# Altium PCB PCB-25x20-mkii.PcbDoc
Units mm, origin at the board's own origin, x right, y up, seen from the top; angles counter-clockwise.
Board outline 63 x 25 mm, 2 copper layers (Top Layer, Bottom Layer); 29 components, 27 nets, 118 pads, 0 vias.
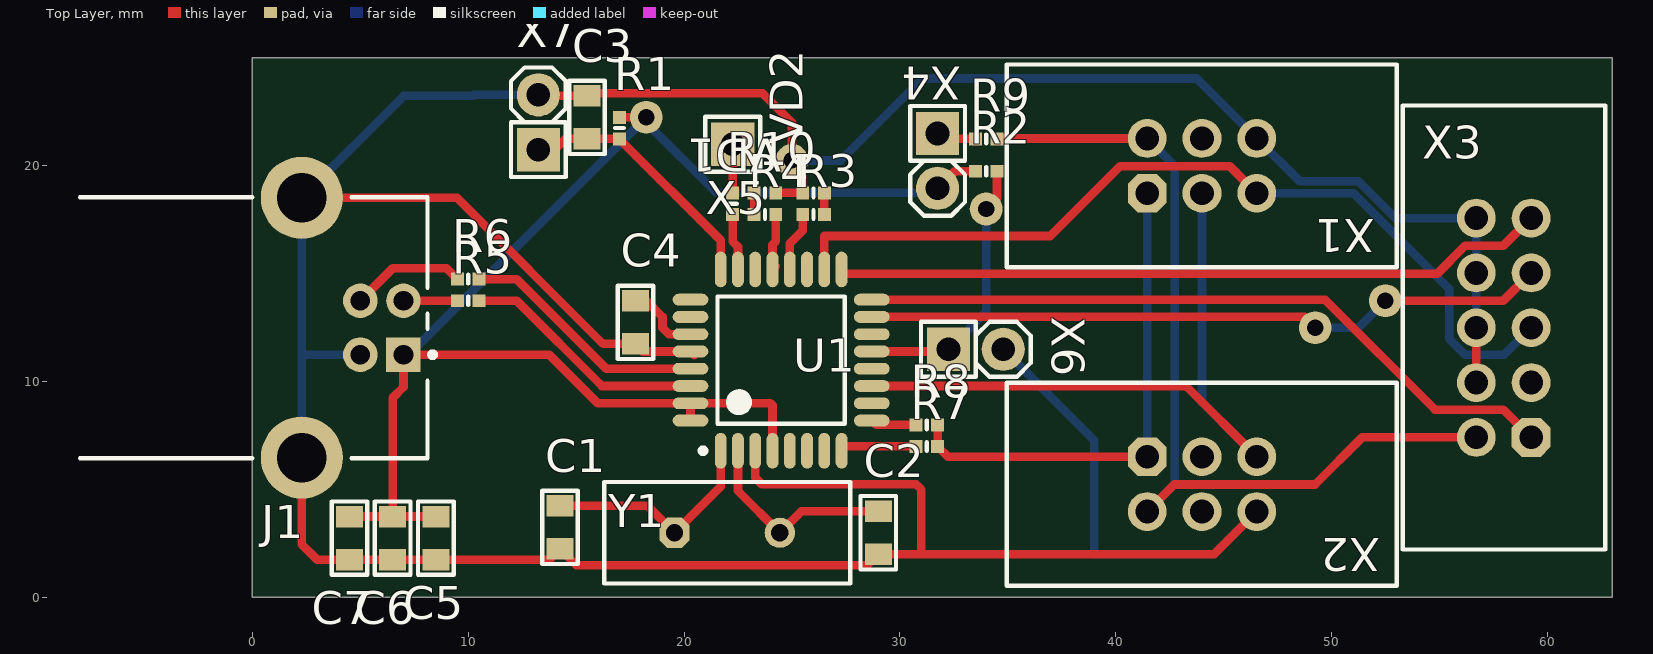
[diagram p0: Top Layer view]
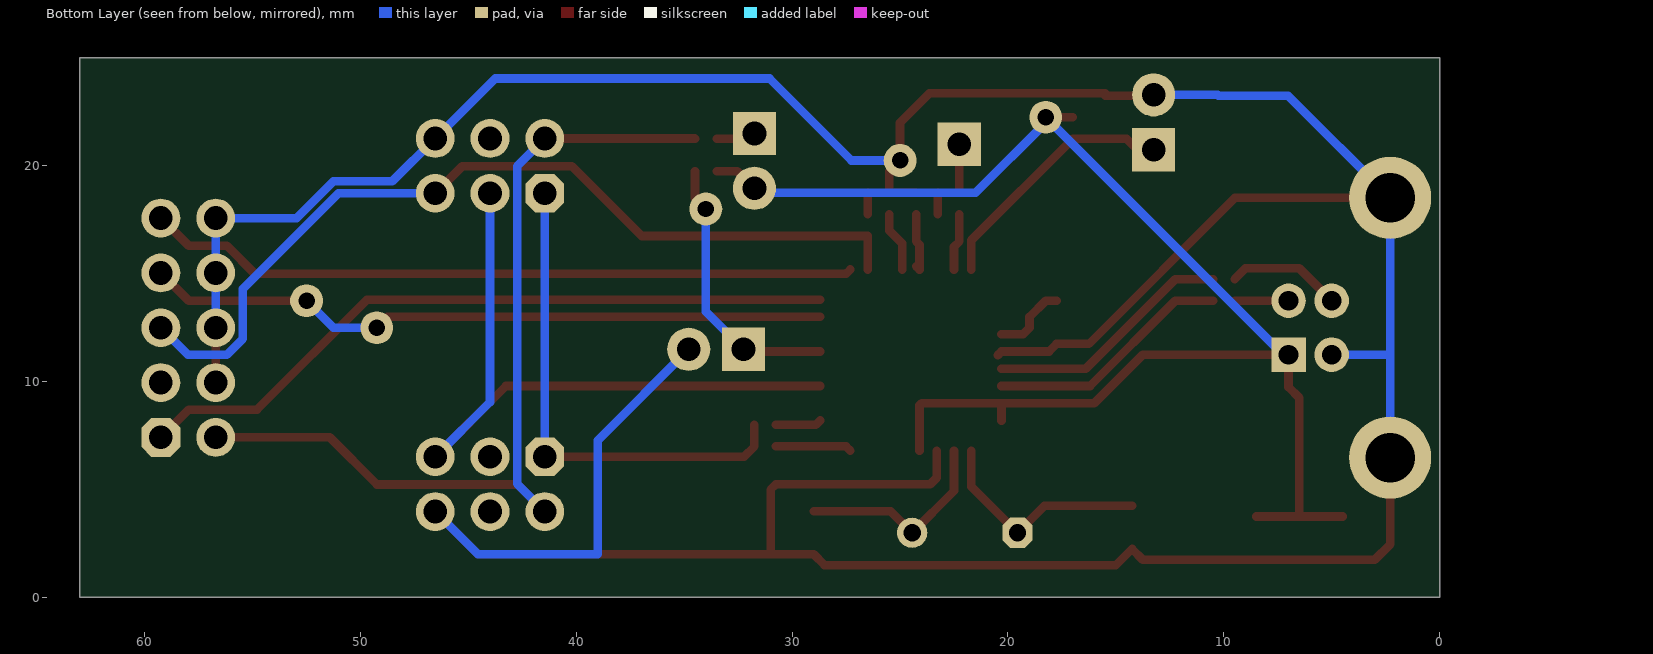
[diagram p1: Bottom Layer view, seen from below]
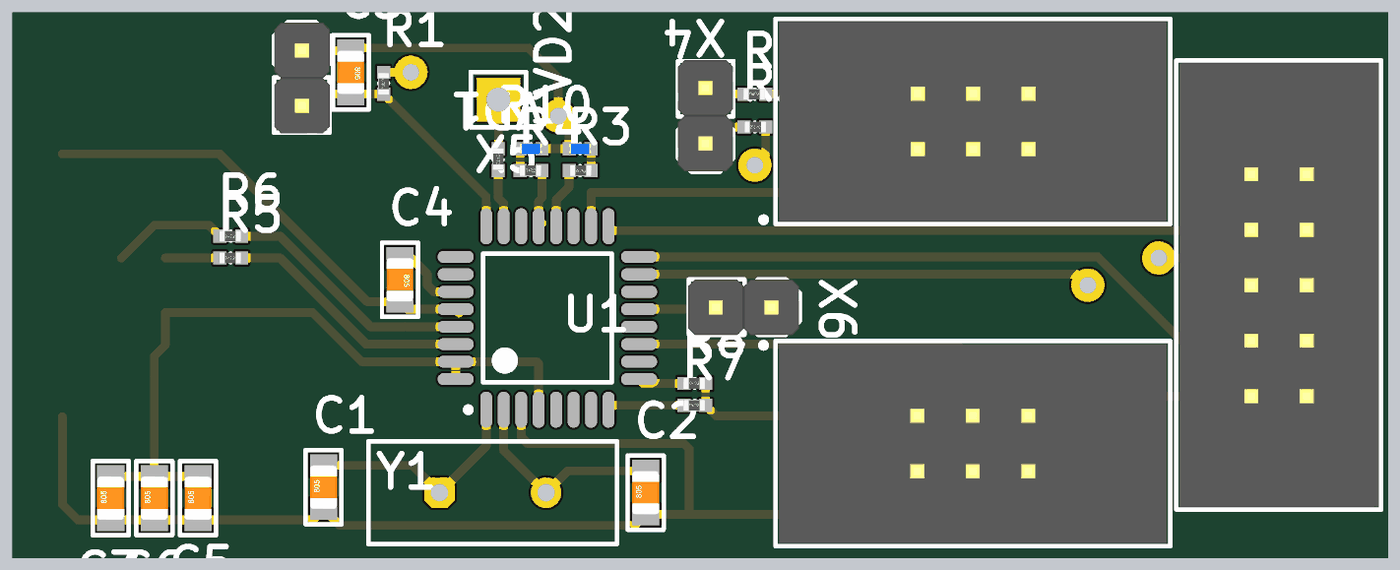
[diagram p2: 3D render of the assembled board from above, using the file's embedded part models]

## Layer stack, top to bottom
Top Solder: solder mask 0.0102, Solder Resist, Dk 3.5
Top Layer: signal copper 0.0356
Dielectric1: dielectric 0.32, FR-4, Dk 4.8
Bottom Layer: signal copper 0.0356
Bottom Solder: solder mask 0.0102, Solder Resist, Dk 3.5

## Board outline
0,0 63,0 63,25 0,25

## Design rules (kind name [scope] priority, off if disabled: settings)
Clearance [All] p1: gap=0.154 ignorepadtopadclearanceinfootprint=FALSE except(0: Arc-Hole Track-Hole SMDPad-Hole THPad-Hole Via-Hole Fill-Hole Poly-Hole Region-Hole Text-Hole)
PolygonConnect [All vs (InPadClass('All Pads'))] p1: connectstyle=Relief reliefconductorwidth=0.254 reliefentries=4 polygonreliefangle="90 Angle" airgapwidth=0.254
PolygonConnect PolygonConnect_Via [All] p2: connectstyle=Direct reliefconductorwidth=0.254 reliefentries=4 polygonreliefangle="90 Angle" airgapwidth=0.254
RoutingVias [All] p1: holewidth=0.711 width=1.27 viastyle="Through Hole" minholewidth=0.711 minwidth=1.27 maxholewidth=0.711 maxwidth=1.27
SilkToSolderMaskClearance SilkscreenOverComponentPads [IsPad] p1: minsilkscreentomaskgap=0.254 clearancetoexposedcopper=TRUE
SolderMaskExpansion [All] p1: expansion=0.102
Width [All] p1: maxlimit=2 minlimit=0.25 preferedwidth=0.4
29 further rules are at their usual default settings.

## Components (designator, comment, footprint, x,y, rotation, side; value= is the part's Value field where it differs from the comment)
C1 "Ceramic capacitor, 22pF, X7R, ±10%, 16V, 0805, -55...+125°C" "CAP: 0805" 14.25,3.25 r90 top value=22pF
C2 "Ceramic capacitor, 22pF, X7R, ±10%, 16V, 0805, -55...+125°C" "CAP: 0805" 29,3 r90 top value=22pF
C3 "Ceramic capacitor, 10μF, X7R, ±10%, 16V, 0805, -55...+125°C" "CAP: 0805" 15.5,22.25 r270 top value=10?F
C4 "Ceramic capacitor, 0.01μF, X7R, ±10%, 16V, 0805, -55...+125°C" "CAP: 0805" 17.75,12.75 r270 top value=0.01?F
C5 "Ceramic capacitor, 10μF, X7R, ±10%, 16V, 0805, -55...+125°C" "CAP: 0805" 8.5,2.75 r270 top value=10?F
C6 "Ceramic capacitor, 0.1μF, X7R, ±10%, 16V, 0805, -55...+125°C" "CAP: 0805" 6.5,2.75 r270 top value=0.1?F
C7 "Ceramic capacitor, 0.1μF, X7R, ±10%, 16V, 0805, -55...+125°C" "CAP: 0805" 4.5,2.75 r270 top value=0.1?F
J1 "1-1470156-1" 1-1470156 -8.01,12.5 r180 top
R1 "Resistor film, 10kR, ±5%, 0402, 0.063W, -55...+125°C" "RES: 0402" 17,21.75 r90 top value=10kR
R2 "Resistor film, 10kR, ±5%, 0402, 0.063W, -55...+125°C" "RES: 0402" 34,19.75 r180 top value=10kR
R3 "Resistor film, 1kR, ±5%, 0402, 0.063W, -55...+125°C" "RES: 0402" 26,17.75 r180 top value=1kR
R4 "Resistor film, 1kR, ±5%, 0402, 0.063W, -55...+125°C" "RES: 0402" 23.75,17.75 r0 top value=1kR
R5 "Resistor film, 27R, ±5%, 0402, 0.063W, -55...+125°C" "RES: 0402" 10,13.75 r0 top value=27R
R6 "Resistor film, 27R, ±5%, 0402, 0.063W, -55...+125°C" "RES: 0402" 10,14.75 r0 top value=27R
R7 "Resistor film, 47R, ±5%, 0402, 0.063W, -55...+125°C" "RES: 0402" 31.25,7 r0 top value=47R
R8 "Resistor film, 47R, ±5%, 0402, 0.063W, -55...+125°C" "RES: 0402" 31.25,8 r0 top value=47R
R9 "Resistor film, 1R, ±5%, 0402, 0.063W, -55...+125°C" "RES: 0402" 34,21.25 r0 top value=1R
R10 "Resistor film, 100R, ±5%, 0402, 0.063W, -55...+125°C" "RES: 0402" 22.25,18.25 r270 top value=100R
U1 "90USB162-16AU" 32MA_N 24.5,11 r90 top
VD1 "LED, *, *, *, -55...+150°C" "LED: 0402B" 23.75,18.75 r0 top
VD2 "LED, *, *, *, -55...+150°C" "LED: 0402B" 26,18.75 r180 top
X1 "Connector, 6pin, 2.54mm, 250VAC, 3A" "CON: IDC-6MS"#1 44,20 r0 top
X2 "Connector, 6pin, 2.54mm, 250VAC, 3A" "CON: IDC-6MS"#2 44,5.25 r0 top
X3 "Connector, 10pin, 2.54mm, 250VAC, 3A" "CON: IDC-10MS" 57.98,12.5 r90 top
X4 "Connector, 2pin, 2.54mm, 500VAC, 3A" "CON: PLS-2" 31.75,20.23 r270 top
X5 "Connector, 2pin, 2.54mm, 500VAC, 3A" "CON: PLS-1" 22.25,21 r0 top
X6 "Connector, 2pin, 2.54mm, 500VAC, 3A" "CON: PLS-2" 33.52,11.5 r0 top
X7 "Connector, 2pin, 2.54mm, 500VAC, 3A" "CON: PLS-2" 13.25,22.02 r90 top
Y1 "16MHz" HC-49U 22,3 r0 top

## Footprints (in the part's own frame and the unit in brackets; to place one, negate y for a bottom-side part, rotate by r counter-clockwise, add the part's x,y. Pads: shape width x height; smd on the part's side, far side on the other; paste and mask are expansions set on the pad)
1-1470156 [mm] "Connector; USB1.1, Type B, Thru-Hole; 4 Position; Right Angle"
  rect 1.6x1.6 hole 0.92: 1(-15.01,1.25)
  round 1.6 hole 0.92: 2(-15.01,-1.25) 3(-13.01,-1.25) 4(-13.01,1.25)
  round 3.8 hole 2.3: 5(-10.3,6.02) 6(-10.3,-6.02)
  silkscreen extent -16.49,-6.05 -0.02,6.05
32MA_N [mm] "Thin QFP, 32-Leads, Body 7x7mm, Pitch 0.8mm, IPC Medium Density"
  oval 1.65x0.55 smd: 1(-4.2,2.8) 2(-4.2,2) 3(-4.2,1.2) 4(-4.2,0.4) 5(-4.2,-0.4) 6(-4.2,-1.2) 7(-4.2,-2) 8(-4.2,-2.8) 17(4.2,-2.8) 18(4.2,-2) 19(4.2,-1.2) 20(4.2,-0.4) 21(4.2,0.4) 22(4.2,1.2) 23(4.2,2) 24(4.2,2.8)
  oval 0.55x1.65 smd: 9(-2.8,-4.2) 10(-2,-4.2) 11(-1.2,-4.2) 12(-0.4,-4.2) 13(0.4,-4.2) 14(1.2,-4.2) 15(2,-4.2) 16(2.8,-4.2) 25(2.8,4.2) 26(2,4.2) 27(1.2,4.2) 28(0.4,4.2) 29(-0.4,4.2) 30(-1.2,4.2) 31(-2,4.2) 32(-2.8,4.2)
  silkscreen extent -4.32,-2.95 2.95,3.75, body extent -3.5,-3.5 3.5,3.5, height 1.2
"CAP: 0805" [mm]
  rect 1x1.25 smd: 1(-1,0) 2(1,0)
  silkscreen extent -1.7,-0.82 1.7,0.82, body extent -1,-0.62 1,0.63, height 0.78
"CON: IDC-6MS"#1 [mm] "IDC-6MS 6 pin PCB-mount connector"
  oct 1.8x1.8 hole 1.1: 1(-2.54,-1.27)
  round 1.8 hole 1.1: 2(-2.54,1.27) 3(0,-1.27) 4(0,1.27) 5(2.54,-1.27) 6(2.54,1.27)
  round 0.5 on Top Overlay: ""(-9.6,-4.5)
  round 0.5 on Mech1: ""(-8.4,-4)
  silkscreen extent -9.05,-4.7 9.03,4.7, body extent -8.89,-4.55 8.87,4.55, height 9
"CON: IDC-6MS"#2 [mm] "IDC-6MS 6 pin PCB-mount connector"
  oct 1.8x1.8 hole 1.1: 1(-2.54,1.27)
  round 1.8 hole 1.1: 2(-2.54,-1.27) 3(0,1.27) 4(0,-1.27) 5(2.54,1.27) 6(2.54,-1.27)
  round 0.5 on Top Overlay: ""(-9.6,4.5)
  round 0.5 on Mech1: ""(-8.4,4)
  silkscreen extent -9.05,-4.7 9.03,4.7, body extent -8.89,-4.55 8.87,4.55, height 9
"CON: IDC-10MS" [mm] "IDC-10MS 10 pin PCB-mount header"
  oct 1.8x1.8 hole 1.1: 1(-5.08,-1.27)
  round 1.8 hole 1.1: 2(-5.08,1.27) 3(-2.54,-1.27) 4(-2.54,1.27) 5(0,-1.27) 6(0,1.27) 7(2.54,-1.27) 8(2.54,1.27) 9(5.08,-1.27) 10(5.08,1.27)
  round 0.5 on Mech1: ""(-9.6,-4)
  round 0.5 on Top Overlay: ""(-9.6,-4)
  silkscreen extent -10.28,-4.7 10.3,4.67, body extent -10.14,-4.57 10.16,4.53, height 9
"CON: PLS-1" [mm]
  rect 2x2 hole 1.1: 1(0.005,0)
  silkscreen extent -1.26,-1.27 1.28,1.27
"CON: PLS-2" [mm]
  rect 2x2 hole 1.1: 1(-1.27,0)
  round 2 hole 1.1: 2(1.27,0)
  silkscreen extent -2.54,-1.27 2.54,1.27, body extent -2.57,-1.28 2.51,1.26, height 8.54
HC-49U [mm] "Quartz Crystal, Thru-Hole; 2 Leads; Body 11.35 x 4.65 x 13.46 mm (LxWxH max)"
  oct 1.4x1.4 hole 0.8: 1(-2.44,0)
  round 1.4 hole 0.8: 2(2.44,0)
  silkscreen extent -5.7,-2.35 5.7,2.35
"LED: 0402B" [mm]
  rect 0.6x0.6 smd: 1(-0.5,0) 2(0.5,0)
  silkscreen extent 0,-0.2 0,0.2, body extent -0.5,-0.25 0.51,0.25, height 0.45
"RES: 0402" [mm]
  rect 0.6x0.6 smd: 1(-0.5,0) 2(0.5,0)
  silkscreen extent 0,-0.2 0,0.2, body extent -0.52,-0.25 0.48,0.25, height 0.34

## Part data
C1 C2: library part Ceramic_0805, Manufacturer=Yageo, Package=0805, PartNumber=CC0805KRX7R7BB104, Temperature=-55...+125°C, Tolerance=±10%, TypeCapacitor="Ceramic capacitor", TypeDielectric=X7R, Voltage=16V, HelpURL=https://www.digikey.com/product-detail/en/yageo/CC0805KRX7R7BB104/311-1142-1-ND/303052, ValueManufacturerPartNumber="Ceramic capacitor, 22pF, X7R, ±10%, 16V, 0805, -55...+125°C"
C3 C5: library part Ceramic_0805, Manufacturer=Yageo, Package=0805, PartNumber=CC0805KRX7R7BB104, Temperature=-55...+125°C, Tolerance=±10%, TypeCapacitor="Ceramic capacitor", TypeDielectric=X7R, ValueManufacturerPartNumber="Ceramic capacitor, 10?F, X7R, ±10%, 16V, 0805, -55...+125°C", Voltage=16V, HelpURL=https://www.digikey.com/product-detail/en/yageo/CC0805KRX7R7BB104/311-1142-1-ND/303052
C4: library part Ceramic_0805, Manufacturer=Yageo, Package=0805, PartNumber=CC0805KRX7R7BB104, Temperature=-55...+125°C, Tolerance=±10%, TypeCapacitor="Ceramic capacitor", TypeDielectric=X7R, ValueManufacturerPartNumber="Ceramic capacitor, 0.01?F, X7R, ±10%, 16V, 0805, -55...+125°C", Voltage=16V, HelpURL=https://www.digikey.com/product-detail/en/yageo/CC0805KRX7R7BB104/311-1142-1-ND/303052
C6 C7: library part Ceramic_0805, Manufacturer=Yageo, Package=0805, PartNumber=CC0805KRX7R7BB104, Temperature=-55...+125°C, Tolerance=±10%, TypeCapacitor="Ceramic capacitor", TypeDielectric=X7R, ValueManufacturerPartNumber="Ceramic capacitor, 0.1?F, X7R, ±10%, 16V, 0805, -55...+125°C", Voltage=16V, HelpURL=https://www.digikey.com/product-detail/en/yageo/CC0805KRX7R7BB104/311-1142-1-ND/303052
J1: "USB 1.1, Right Angle, Thru-Hole, B Type, Receptacle, 4 Position, White", PackageDocument=02-Jun-2001, ComponentLink1Description="Manufacturer Link", ComponentLink1URL=http://www.tycoelectronics.com/, ComponentLink2Description="Packaging Specification", ComponentLink2URL=http://ecommas.tycoelectronics.com/commerce/DocumentDelivery/DDEController?Action=showdoc&DocId=Customer+Drawing%7F1470156%7FO%7Ftif%7FEnglish%7FC_1470156_O.tif, ContactMaterial="Phosphor Bronze", ContactPlating="Gold over Nickel", DatasheetDocument=02-Jun-2001, DrillSize="Corresponds to nominal value.", HousingMaterial="Glass-Filled Thermoplastic", PackageReference=1-1470156, PanelGround=Without, PCB_Layout="Complies with manufacturer's recommendation.", Published=15-Jul-2004, Publisher="Altium Limited", TerminationLength="3.00mm [0.118in.]"
R1 R2 R3 R4 R5 R6 R7 R8 R9 R10: library part Resistor_0402, Manufacturer=Yageo, Package=0402, PartNumber=RC0402JR-07100RL, Power=0.063W, Temperature=-55...+125°C, Tolerance=±5%, TypeResistor="Resistor film", HelpURL=https://www.digikey.com/product-detail/en/yageo/RC0402JR-07100RL/311-100JRCT-ND/729362
  R1 R2: ValueManufacturerPartNumber="Resistor film, 10kR, ±5%, 0402, 0.063W, -55...+125°C"
  R3 R4: ValueManufacturerPartNumber="Resistor film, 1kR, ±5%, 0402, 0.063W, -55...+125°C"
  R5 R6: ValueManufacturerPartNumber="Resistor film, 27R, ±5%, 0402, 0.063W, -55...+125°C"
  R7 R8: ValueManufacturerPartNumber="Resistor film, 47R, ±5%, 0402, 0.063W, -55...+125°C"
  R9: ValueManufacturerPartNumber="Resistor film, 1R, ±5%, 0402, 0.063W, -55...+125°C"
  R10: ValueManufacturerPartNumber="Resistor film, 100R, ±5%, 0402, 0.063W, -55...+125°C"
U1: "8-bit AVR Microcontroller, 2.7-5.5V, 16KB Flash, 512 Bytes EEPROM, 512 Bytes SRAM, USB Controller, 32-pin TQFP, Industrial Grade (-40°C to 85°C)", ComponentLink1Description="Manufacturer URL", ComponentLink1URL=http://www.atmel.com/, ComponentLink2Description="AT90USB82/162 Datasheet", ComponentLink2URL=http://www.atmel.com/dyn/resources/prod_documents/doc7707.pdf, DatasheetVersion="revF, Nov-2010", PackageDescription="32-Lead Thin Profile Plastic Quad Flatpack (TQFP) - 7x7x1mm Body,  0.8 mm Pitch", PackageReference=32MA, PackageVersion="revB, Jul-2007"
VD1 VD2: library part LED_single, Color=GREEN, Temperature=-55...+150°C, TypeDiode=LED, ValueManufacturerPartNumber="LED, *, *, *, -55...+150°C"
X1 X2: library part IDC-6, CurrentMax=3A, Manufacturer=Connfly, VoltageMax=250VAC, HelpURL=https://ru.aliexpress.com/item/1719644716.html?spm=a2g0v.search0104.3.23.4d9c1bc6xlIt6Q&ws_ab_test=searchweb0_0%2Csearchweb201602_10_10065_10068_319_317_10696_453_10084_454_10083_10618_10307_10301_537_536_10059_10884_10887_321_322_10915_10103_10914_10911_10910%2Csearchweb201603_52%2CppcSwitch_0&algo_expid=18a75006-9775-490c-9b34-8e5eba9edd8d-3&algo_pvid=18a75006-9775-490c-9b34-8e5eba9edd8d&transAbTest=ae803_5, Multichannel=6pin, PartNumber=IDC-6, Pitch=2.54mm, TypeConnector=Connector, ValueManufacturerPartNumber="Connector, 6pin, 2.54mm, 250VAC, 3A"
  X1: CommentText="\"PTI\""
  X2: CommentText="\"PDI\""
X3: library part IDC-10, CurrentMax=3A, Manufacturer=Connfly, VoltageMax=250VAC, CommentText="\"ISP\"", HelpURL=https://www.chipdip.ru/product/idc-10ms, Multichannel=10pin, PartNumber=IDC-10, Pitch=2.54mm, TypeConnector=Connector, ValueManufacturerPartNumber="Connector, 10pin, 2.54mm, 250VAC, 3A"
X4 X6 X7: library part PLS-2, CurrentMax=3A, Manufacturer=Connfly, VoltageMax=500VAC, CommentText="\"Ðàçúåì\"", HelpURL=https://www.chipdip.ru/product/pls-2, Multichannel=2pin, PartNumber=PLS-2, Pitch=2.54mm, TypeConnector=Connector, ValueManufacturerPartNumber="Connector, 2pin, 2.54mm, 500VAC, 3A"
X5: library part PLS-1, CurrentMax=3A, Manufacturer=Connfly, VoltageMax=500VAC, ="EXTERNAL CLOCK", CommentText="\"Ðàçúåì\"", HelpURL=https://www.chipdip.ru/product/pls-2, Multichannel=2pin, PartNumber=PLS-1, Pitch=2.54mm, TypeConnector=Connector, ValueManufacturerPartNumber="Connector, 2pin, 2.54mm, 500VAC, 3A"
Y1: library part ECS-10-13-1, "Crystal Oscillator", ComponentLink1Description="Manufacturer Link", ComponentLink1URL=http://www.ecsxtal.com/, ComponentLink2Description=Datasheet, ComponentLink2URL=http://www.ecsxtal.com/pdf2/HC49U.PDF, DatasheetDocument=18-Apr-2000, PackageReference=HC-49U, Published=17-Jul-2002, Publisher="Altium Limited"

## Free pads (board coordinates)
  round 1.524 hole 0.762: 5(25,20.25) 7(18.25,22.25) 8(52.5,13.75) 9(49.25,12.5) 11(34,18)

## Nets (pads, with @x,y where several pads share a name; then routed paths per layer and width w, separated by ;. In a path a pad name is that pad's centre, name@x,y a point inside that pad or via, vN(x,y) a via of type N, cw(c..) or ccw(c..) an arc to the next point about the centre after c; other vN are vias at no path point)
CLK: U1.11 X1.3 X2.5 | length 32.5
  Top Layer w0.4: U1.11 43.26,9.8 X2.5
  Bottom Layer w0.4: X1.3 44,9.06 X2.5
CLK_EXT: R10.2 U1.23 | length 2.7
  Top Layer w0.4: R10.2 22.25,16.5 22.5,16.25 U1.23
D+: J1.3 R6.1 | length 5.3
  Top Layer w0.4: J1.3 6.5,15.25 9,15.25 R6.1
D-: J1.2 R5.1 | length 2.5
  Top Layer w0.4: J1.2 R5.1
DATA: R7.2 R8.2 X1.1 X2.1 | length 23.1
  Top Layer w0.4: R8.2 R7.2 32.23,6.52 X2.1
  Bottom Layer w0.4: X2.1 X1.1
GND: C1.1 C2.1 C3.1 C4.2 C5.2 C6.2 C7.2 J1.4 J1.5 J1.6 pad.5 U1.3 U1.28 VD1.2 VD2.2 X1.6 X2.6 X3.4 X3.6 X3.8 X3.10 X6.2 X7.2 | length 191.5
  Top Layer w0.4: J1.5 2.29,2.46 3,1.75 C7.2 C6.2 C5.2 13.75,1.75 C1.1 15,1.5 28.5,1.5 C2.1 31,2 ; J1.6 9.48,18.52 16.25,11.75 C4.2 18.1,11.4 U1.28 U1.28@20.471,11.229 ; X7.2 13.29,23.25 C3.1 15.5,23.366 23.634,23.366 25,22 pad.5 25.5,19.75 VD2.2 VD1.2 ; U1.3 23.3,5.55 23.6,5.25 30.75,5.25 31,5 31,2 ; X2.6 44.56,2 31,2 ; X3.4 X3.6
  Bottom Layer w0.4: J1.5 2.29,11.25 ; J1.4 2.29,11.25 ; X7.2 10.29,23.29 10.25,23.25 7.02,23.25 J1.6 2.29,11.25 ; pad.5 27.25,20.25 31.047,24.047 43.763,24.047 X1.6 48.526,19.284 51.249,19.284 52.953,17.58 X3.10 X3.8 X3.6 ; X6.2 39,7.29 39,2 44.56,2 X2.6
JP_HWB: pad.11 R2.1 U1.13 X6.1 | length 13
  Top Layer w0.4: U1.13 32.4,11.4 X6.1@32.5,11.5 ; pad.11 34.5,18.5 R2.1
  Bottom Layer w0.4: X6.1 34,13.25 pad.11
JP_RES: C3.2 R1.1 U1.24 X7.1 | length 12
  Top Layer w0.4: X7.1 14,20.75 14.5,21.25 C3.2 R1.1 21.696,16.554 21.696,16.271 21.7,16.267 U1.24
LED1: R3.2 U1.20 | length 2.8
  Top Layer w0.4: U1.20 24.9,16.4 25.5,17 R3.2
LED2: R4.2 U1.21 | length 2.8
  Top Layer w0.4: U1.21@24.25,15.35 U1.21 24.1,16.35 24.25,16.5 R4.2
MISO: U1.17 X3.9 | length 33.1
  Top Layer w0.4: U1.17 27.5,15 54.897,15 56.191,16.294 57.964,16.294 X3.9
MOSI: U1.16 X3.1 | length 33.2
  Top Layer w0.4: U1.16 49.7,13.8 54.794,8.706 57.964,8.706 X3.1
NetC4_1: C4.1 U1.27 | length 3.5
  Top Layer w0.4: C4.1 18.25,13.75 19,13 19,12.5 19.3,12.2 U1.27
NetR3_1: R3.1 VD2.1 | length 1
  Top Layer w0.4: R3.1 VD2.1
NetR4_1: R4.1 VD1.1 | length 1
  Top Layer w0.4: R4.1 VD1.1
NetR5_2: R5.2 U1.30 | length 11.4
  Top Layer w0.4: R5.2 12.25,13.75 16.2,9.8 U1.30
NetR6_2: R6.2 U1.29 | length 11.5
  Top Layer w0.4: R6.2 12.25,14.75 16.4,10.6 U1.29
NetR7_1: R7.1 U1.8 | length 3.5
  Top Layer w0.4: U1.8 27.5,7 R7.1
NetR8_1: R8.1 U1.9 | length 2.1
  Top Layer w0.4: U1.9 28.9,8 R8.1
NetR9_1: R9.1 X4.1 | length 1.9
  Top Layer w0.4: X4.1 32,21.25 R9.1
NetR10_1: R10.1 X5.1 | length 2.3
  Top Layer w0.4: R10.1 22.255,18.755 X5.1
RES: U1.18 X1.5 X3.5 | length 41.1
  Top Layer w0.4: U1.18 26.5,16.75 36.972,16.75 40.206,19.984 45.286,19.984 X1.5
  Bottom Layer w0.4: X1.5 51.02,18.73 55.456,14.294 55.456,11.981 56.191,11.246 57.996,11.246 X3.5
SCK: pad.8 pad.9 U1.15 X3.7 | length 31.8
  Top Layer w0.4: U1.15 48.75,13 pad.9 ; pad.8 56.187,13.75 56.191,13.754 57.964,13.754 X3.7
  Bottom Layer w0.4: pad.9 51.25,12.5 pad.8
VCC: C5.1 C6.1 C7.1 J1.1 pad.7 R1.2 R2.2 U1.4 U1.31 U1.32 X4.2 | length 67.7
  Top Layer w0.4: C7.1 C6.1 ; C5.1 C6.1 ; R1.2 pad.7 ; U1.32 U1.31 ; U1.4 24.1,8.9 24,9 U1.31 ; X4.2 32.54,19.75 R2.2 ; C6.1 6.5,9.25 7,9.75 J1.1 13.75,11.25 16,9 U1.31
  Bottom Layer w0.4: J1.1 7.25,11.25 pad.7 18.25,22 21.5,18.75 X4.2@32.5,18.75
VCC_T: R9.2 X1.2 X2.2 X3.2 | length 42
  Top Layer w0.4: R9.2 34.52,21.27 X1.2 ; X2.2 42.714,5.234 49.234,5.234 51.42,7.42 X3.2
  Bottom Layer w0.4: X2.2 42.746,5.266 42.746,19.984 X1.2
XTAL1: C1.2 U1.1 Y1.1 | length 10.5
  Top Layer w0.4: C1.2 18.31,4.25 Y1.1 21.7,5.14 U1.1
XTAL2: C2.2 U1.2 Y1.2 | length 9.6
  Top Layer w0.4: U1.2 22.5,4.94 Y1.2 25.44,4 C2.2
pads on no net: U1.5 U1.6 U1.7 U1.10 U1.12 U1.14 U1.19 U1.22 U1.25 U1.26 X1. X1.4 X2. X2.3 X2.4 X3. X3.3

## Silkscreen, mask and mechanical layers (free items; w line width, h text height)
Drill Drawing:
  the board outline again, w0.2

## Text inside footprints (layer, text, board x,y; h text height)
J1: Mechanical 1 "PCB Edge" at -7.685,18.152 h0.25 r270